# Altium PCB D-V02_touch [00ps1497][panel].PcbDoc
Units mil, origin at the board's own origin, x right, y up, seen from the top; angles counter-clockwise.
Board outline 6376.85 x 1946.26 mil, 2 copper layers (Top Layer, Bottom Layer); 20 components, 33 nets, 63 pads, 0 vias.
Unrouted connection lines stored in the file: 4.
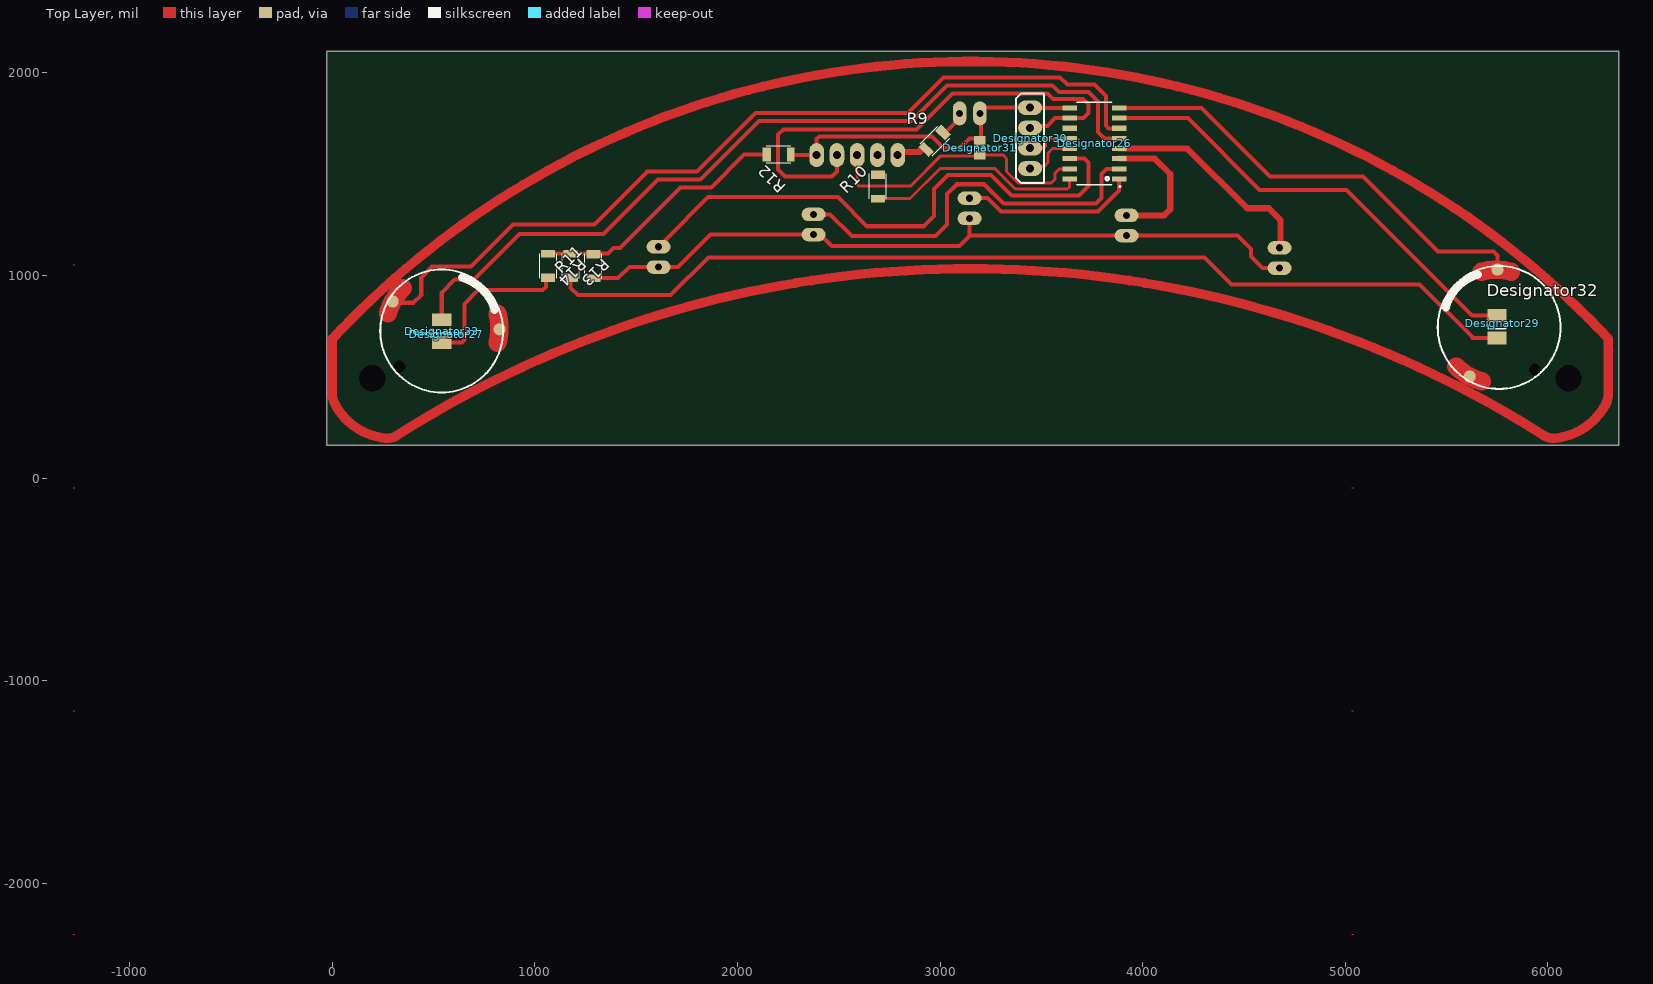
[diagram p0: Top Layer view]
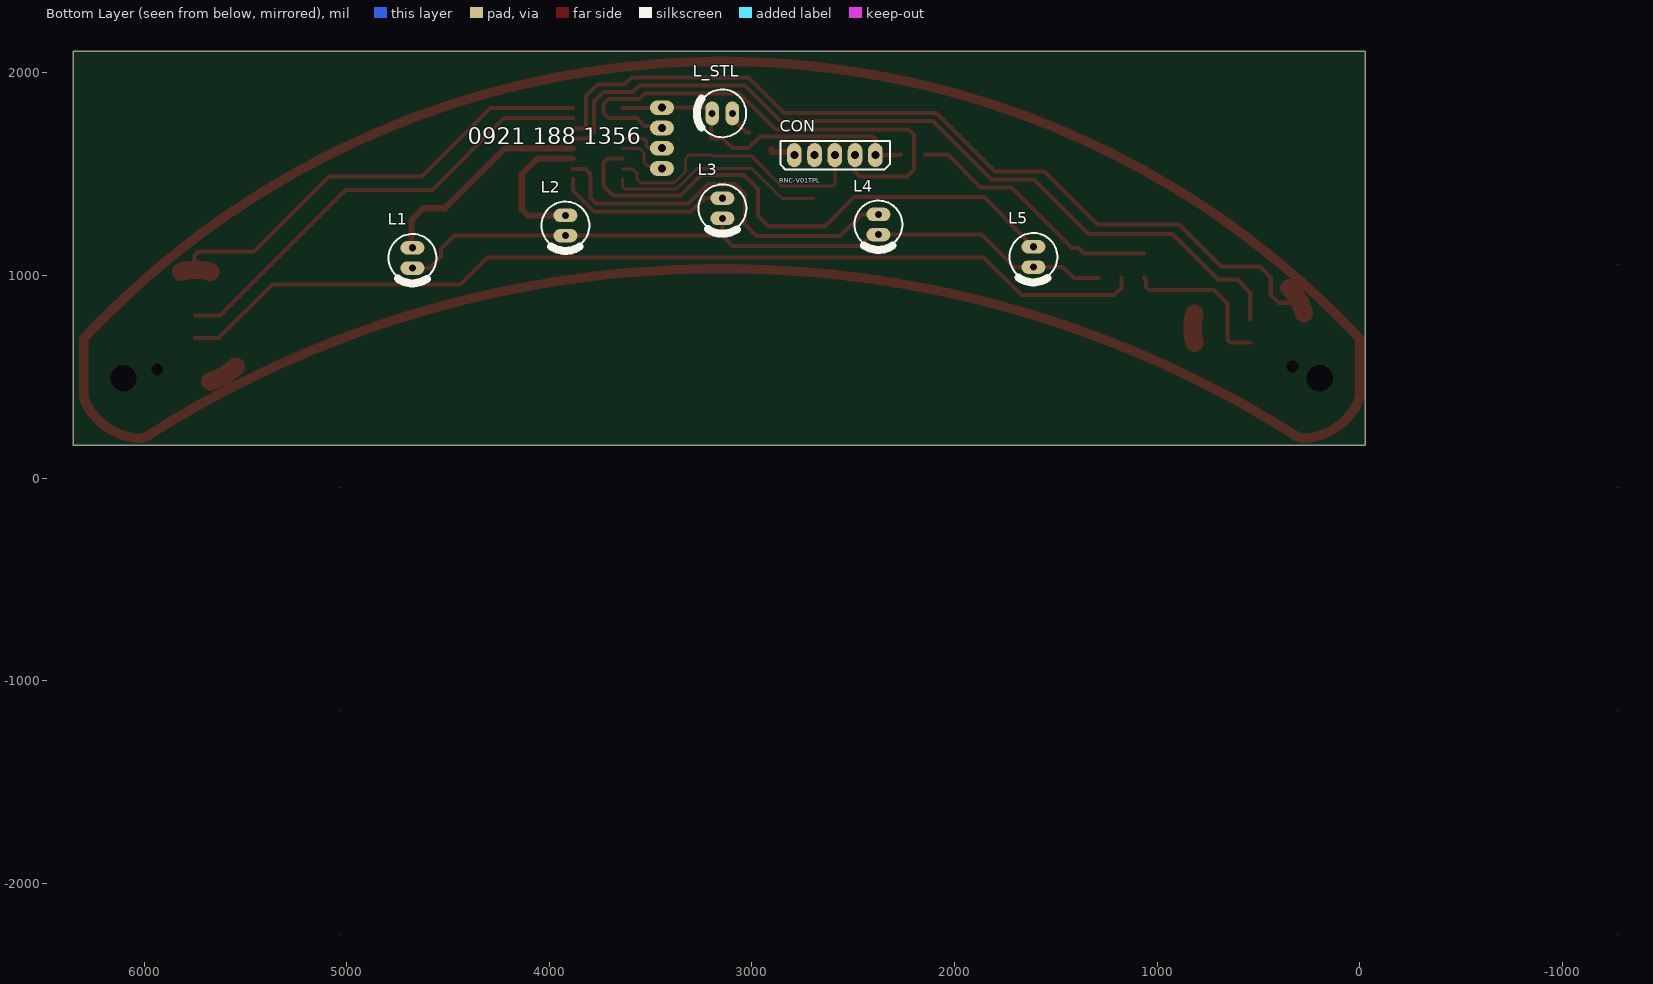
[diagram p1: Bottom Layer view, seen from below]

## Layer stack, top to bottom
Top Solder: solder mask 0.4, Solder Resist, Dk 3.5
Top Layer: signal copper 1.4
Dielectric 1: dielectric 12.6, FR-4, Dk 4.8
Bottom Layer: signal copper 1.4
Bottom Solder: solder mask 0.4, Solder Resist, Dk 3.5

## Board outline
-26.3,160.75 6350.55,160.75 6350.55,2107.01 -26.3,2107.01

## Design rules (kind name [scope] priority, off if disabled: settings)
Clearance [All] p1: gap=15 ignorepadtopadclearanceinfootprint=FALSE
PolygonConnect [All] p1: connectstyle=Relief reliefconductorwidth=10 reliefentries=4 polygonreliefangle="90 Angle" airgapwidth=10
RoutingVias [All] p1: holewidth=28 width=50 viastyle="Through Hole" minholewidth=28 minwidth=50 maxholewidth=28 maxwidth=50
SolderMaskExpansion [All] p1: expansion=4 istentingtop=FALSE
Width [All] p1: maxlimit=100 minlimit=10 preferedwidth=10 minimp=50.000000 maximp=50.000000 favimp=50.000000
30 further rules are at their usual default settings.

## Classes and differential pairs
component class jaro_khodesh_main: T1

## Components (designator, comment, footprint, x,y, rotation, side; value= is the part's Value field where it differs from the comment)
CON "" XH5 2391.08,1594.12 r0 bottom
Designator26 "Comment" bs83b08-a 3762.05,1676.61 r180 top
Designator27 "Comment" fanar-touch 529.19,733.44 r180 top
Designator29 "Comment" fanar-touch 5752.64,732.8 r270 top
Designator30 "Comment" CONECTOR/XH/4PIN 3444.37,1528.39 r90 top
Designator31 "Comment" CAP-0805 3195.92,1593.13 r90 top
Designator32 "Comment" LED2835 5746.22,752.87 r0 top
Designator33 "Comment" LED2835 536.93,731.3 r0 top
L1 "" led_dip_5MM_T 4675.87,1086.6 r0 bottom
L2 "" led_dip_5MM_T 3920.87,1246.6 r0 bottom
L3 "" led_dip_5MM_T 3145.8,1331.6 r0 bottom
L4 "" led_dip_5MM_T 2375.87,1251.6 r0 bottom
L5 "" led_dip_5MM_T 1610.87,1091.6 r0 bottom
L_STL "" led_dip_5MM_T 3146.77,1800.38 r90 bottom
R9 "10K" RES/1206 2970.67,1668.5 r225 top
R10 "10K" RES/1206 2688.27,1440.12 r270 top (schematic designator R9)
R11 "10K" RES/1206 1283.5,1047.12 r270 top (schematic designator R9)
R12 "10K" RES/1206 2202.78,1592.53 r0 top (schematic designator R9)
R13 "10K" RES/1206 1182.05,1047.4 r90 top (schematic designator R9)
R14 "10K" RES/1206 1070.31,1047.4 r90 top (schematic designator R9)

## Footprints (in the part's own frame and the unit in brackets; to place one, negate y for a bottom-side part, rotate by r counter-clockwise, add the part's x,y. Pads: shape width x height; smd on the part's side, far side on the other; paste and mask are expansions set on the pad)
bs83b08-a [mm]
  rect 1.8x0.64 smd: 1(-3.105,5.08) 2(-3.105,3.81) 3(-3.105,2.54) 4(-3.105,1.27) 5(-3.105,0) 6(-3.105,-1.27) 7(-3.105,-2.54) 8(-3.105,-3.81) 9(3.105,-3.81) 10(3.105,-2.54) 11(3.105,-1.27) 12(3.105,0) 13(3.105,1.27) 14(3.105,2.54) 15(3.105,3.81) 16(3.105,5.08)
  silkscreen extent -3.3,-4.51 2.2,6.13, body extent -3.55,-4.87 3.56,6.15, height 2.14
CAP-0805 [mm]
  rect 1.15x1.45 smd: 1(0.025,-0.022) 2(1.825,-0.022)
  silkscreen extent 0.93,-0.57 0.93,0.53, body extent -0.17,-0.71 1.84,0.54, height 0.94
CONECTOR/XH/4PIN [mm]
  oval 1.85x3 hole 1: 1(0,0) 2(2.54,0) 3(5.08,0) 4(7.62,0)
  silkscreen extent -1.81,-1.73 9.43,1.75
fanar-touch [mil]
  round 60 smd paste-60: 1(-296.59,-0.87) 1(231.39,-137.96)
  oct 0x0 hole 59.06: 5(196.51,183.17)
  Top Layer lines w90: 254.85,-78.54 cw(c-15.61,-6.07) 181.76,-204.68 ; -285.95,-78.97 cw(c-15.61,-6.07) -286.06,66.4
  silkscreen extent -314,-296 292,311, body extent -394,-371 371,397, height 634
LED2835 [mm]
  rect 2.4x1.6 smd: A(0.086,1.287) K(0.086,-1.563)
  silkscreen extent -1.01,-0.39 1.19,0.11, body extent -1.31,-1.89 1.49,1.61, height 1.85
led_dip_5MM_T [mm]
  oval 3x1.7 hole 0.9: A(0,-1.27) K(0,1.27)
  silkscreen extent -3,-3 3,3.18
RES/1206 [mm]
  rrect14% 1.09x1.77 smd: 1(-1.469,0.131)
  rrect14% 0.94x1.77 smd: 2(1.536,0.131)
  silkscreen extent -1.55,-0.93 1.55,1.2
XH5 [mm]
  oval 1.85x3 hole 1: 1(-0.003,0) 2(2.537,0) 3(5.077,0) 4(7.617,0) 5(10.157,0)
  silkscreen extent -1.81,-1.75 11.88,1.81

## Part data
CON: library part XH5
L1 L2 L3 L4 L5 L_STL: library part LED-1COLER
R9 R10 R11 R12 R13 R14: library part RES/SMD

## Free pads (board coordinates)
  round 78.74 hole 129.92: 1(197.24,492.58) 1(6102.76,492.58)

## Nets (pads, with @x,y where several pads share a name; then routed paths per layer and width w, separated by ;. In a path a pad name is that pad's centre, name@x,y a point inside that pad or via, vN(x,y) a via of type N, cw(c..) or ccw(c..) an arc to the next point about the centre after c; other vN are vias at no path point)
+5: CON.2 Designator26.10 Designator30.3 | length 2569.8
  Top Layer w20: CON.2 2490.95,1513.35 2465.47,1487.87 2235.29,1487.87 2200.87,1522.3 2200.87,1696.06 2226.38,1721.58 2884.63,1721.58 3061.28,1898.23 3530.27,1898.23 3556.7,1871.79 3706.67,1871.79 3733.11,1845.35 3733.11,1802.2 3707.52,1776.61 Designator26.10 3568.39,1776.61 3530.27,1738.5 3454.48,1738.5 Designator30.3
DRIVE: CON.4 Designator26.16 R10.1 R10.2 | length 1094
  Top Layer w15: R10.2 2852.25,1379.63 3001.01,1528.39 3270.2,1528.39 3372.03,1426.56 3629.13,1426.56 3639.8,1437.22 Designator26.16
gl1: Designator32.K R13.1 | length 4884.3
  Top Layer w20: R13.1 1176.91,938.01 1212.05,902.87 1670,902.87 1856.69,1089.57 4305.12,1089.57 4438.7,955.98 5367.6,955.98 5632.25,691.33 ; 5629.1,691.33 5632.25,691.33 ; Designator32.K 5632.25,691.33
gl2: Designator33.K R14.1 | length 782.2
  Top Layer w20: Designator33.K 639.94,669.75 651.65,681.47 651.65,859.65 719.57,927.56 1038.19,927.56 1053.86,943.23 1053.86,978.27 R14.1
GND: CON.1 Designator26.9 Designator30.4 Designator31.2 L_STL.K R11.1 R12.1 R12.2 R13.2 R14.2 | length 2936
  Top Layer w20: R14.2 R13.2 1360.8,1107.89 1388.54,1135.63 1419.84,1135.63 1719.45,1435.24 1870.71,1435.24 2033.15,1597.68 R12.1 ; R12.2 2266.83,1594.12 CON.1 2390.95,1673.39 2404.14,1686.58 2959.41,1686.58 3017.6,1628.39 3096.77,1628.39 3145,1676.61 3201.52,1676.61 3201.52,1801.96 3196.77,1806.71 3218.45,1828.39 Designator30.4 3445.26,1827.5 3638.92,1827.5 Designator26.9
L1: Designator26.4 L1.A | length 1092.8
  Top Layer w30: Designator26.4 4221.22,1626.61 4516.06,1331.77 4622.91,1331.77 4681.14,1273.54 4681.14,1131.32 L1.A
L2: Designator26.3 L2.A | length 685.9
  Top Layer w30: Designator26.3 4060.71,1576.61 4136.42,1500.91 4136.42,1326.3 4106.72,1296.6 L2.A
L3: Designator26.1 L3.A | length 864.6
  Top Layer w20: L3.A 3234.85,1381.6 3299.85,1316.6 3780.46,1316.6 3884.29,1420.43 Designator26.1
L4: Designator26.2 L4.A | length 1926.8
  Top Layer w20: L4.A 2457.89,1301.6 2565.65,1193.84 2977.57,1193.84 3034.65,1250.93 3034.65,1401.27 3083.78,1450.39 3217.56,1450.39 3312.42,1355.54 3769.9,1355.54 3797.56,1383.2 3797.56,1501.34 3822.83,1526.61 Designator26.2
L5: Designator26.14 L5.A | length 2752.3
  Top Layer w20: L5.A 1623.76,1141.6 1645.44,1163.28 1645.44,1176.17 1855.72,1386.46 2496.14,1386.46 2639.61,1242.99 2919.13,1242.99 2969.9,1293.76 2969.9,1426.56 3038.95,1495.6 3250.62,1495.6 3352.17,1394.06 3686.42,1394.06 3733.11,1440.75 3733.11,1557.28 3713.78,1576.61 Designator26.14
NetC2_2: 
NetC5_2: 
NetC6_2: 
NetD1_K: 
NetL1_A: L1.K L2.K L3.K L4.K L5.K R11.2 | length 3693.1
  Top Layer w20: R11.2 1411.08,986.63 1466.05,1041.6 L5.K 1705.69,1041.6 1866.18,1202.09 2375.38,1202.09 L4.K 2408.36,1201.6 2465.47,1144.49 3096.44,1144.49 3145.8,1193.84 ; L3.K 3145.8,1196.6 L2.K 4468.95,1196.6 4535.32,1130.24 4535.32,1094.29 4593.01,1036.6 L1.K
NetL_STL_K: L_STL.A R9.1 | length 135.8
  Top Layer w20: R9.1 3027.73,1705.74 3096.77,1774.79 L_STL.A
NetM2_1: 
NetQ1_G: 
NetR1_2: 
NetR2_1: 
p: 
p2: Designator26.13 Designator30.1 | length 234.1
  Top Layer w15: Designator30.1@3473.72,1528.39 3484.78,1539.45 3515.12,1539.45 3532.95,1557.28 3532.95,1603.97 3555.6,1626.61 Designator26.13
S_L: 
S_M: 
S_P: 
STL: CON.5 R9.2 | length 136.4
  Top Layer w30: CON.5 2790.95,1603.97 2795.92,1608.94 2899.18,1608.94 2902.68,1612.44 2902.68,1623.75
SWIM: 
t1: Designator26.8 Designator29.1@5751.77,1029.38 | length 2238
  Top Layer w20: Designator26.8 4291.14,1826.61 4629.53,1488.23 5088.46,1488.23 5457.91,1118.78 5731.1,1118.78 5751.77,1098.11 Designator29.1@5751.77,1029.38
t2: Designator26.6 Designator27.1@297.8,871.4 | length 4289.3
  Top Layer w20: Designator27.1@297.8,871.4 316.28,871.4 322.17,865.51 400.2,865.51 439.13,904.45 439.13,990.47 492.05,1043.39 683.82,1043.39 892.95,1252.52 1293.43,1252.52 1554.8,1513.9 1801.02,1513.9 2088.7,1801.58 2841.43,1801.58 3018.08,1978.23 3592.44,1978.23 3628.88,1941.79 3762.56,1941.79 3818.86,1885.49 3818.86,1740.61 3832.86,1726.61 Designator26.6
tl1: Designator26.7 Designator32.A | length 2268.4
  Top Layer w20: Designator26.7 4224.25,1776.61 4577.83,1423.03 5006.89,1423.03 5626.39,803.53 Designator32.A
tl2: Designator26.5 Designator33.A | length 4098.8
  Top Layer w20: Designator33.A 540.32,916.54 604.41,980.63 698.5,980.63 923.07,1205.2 1339.25,1205.2 1607.95,1473.9 1817.59,1473.9 2105.27,1761.58 2858,1761.58 3034.65,1938.23 3555.6,1938.23 3587.04,1906.79 3731.97,1906.79 3778.86,1859.9 3778.86,1708.5 3810.75,1676.61 Designator26.5
VCC: 
ZDC: CON.3 Designator26.12 Designator26.15 Designator30.2 Designator31.1 | length 1631.6
  Top Layer w15: CON.3 2590.95,1449.53 2599.73,1440.75 2853.86,1440.75 3003.69,1590.58 3193.23,1590.58 Designator31.1 3311.39,1594.12 3327.67,1577.84 3327.67,1513.35 3384.46,1456.56 3548.33,1456.56 3568.39,1476.61 3568.39,1505.71 3589.29,1526.61 Designator26.15 ; Designator30.2 3509.96,1628.39 3521.34,1639.76 3521.34,1665 3532.95,1676.61 Designator26.12
pads on no net: Designator26.11 Designator27.1@825.77,734.31 Designator27.5 Designator29.1@5614.68,501.41 Designator29.5
copper on no net: | length 28968.8
  Top Layer w0.5: -1278.88,-2251.07 -1271.75,-2251.07 -1278.88,-2251.07 ; -1278.88,-1149.49 -1271.75,-1149.49 -1278.88,-1149.49 ; -1278.88,-47.92 -1271.75,-47.92 -1278.88,-47.92 ; -1278.88,1053.66 -1271.75,1053.66 -1278.88,1053.66 ; 5032.14,-2251.07 5039.27,-2251.07 5032.14,-2251.07 ; 5032.14,-1149.49 5039.27,-1149.49 5032.14,-1149.49 ; 5032.14,-47.92 5039.27,-47.92 5032.14,-47.92
  Top Layer w1.18: 0,418.04 ccw(c116.28,418.04) 14.05,362.62 ccw(c295.28,515.06) 262.65,196.85 ccw(c271.58,283.92) 318.54,210.06 cw(c3149.61,-4243.25) 5980.68,210.06 ccw(c6027.63,283.92) 6036.56,196.85 ccw(c6003.94,515.06) 6285.16,362.62 ccw(c6182.93,418.04) 6299.21,418.04 6299.21,687.31 ccw(c3149.61,-2250.36) 0,687.31 0,418.04
  Top Layer w47.24: 0,418.04 ccw(c116.28,418.04) 14.05,362.62 ccw(c295.28,515.06) 262.65,196.85 ccw(c271.58,283.92) 318.54,210.06 cw(c3149.61,-4243.25) 5980.68,210.06 ccw(c6027.63,283.92) 6036.56,196.85 ccw(c6003.94,515.06) 6285.16,362.62 ccw(c6182.93,418.04) 6299.21,418.04 6299.21,687.31 ccw(c3149.61,-2250.36) 0,687.31 0,418.04

## Silkscreen, mask and mechanical layers (free items; w line width, h text height)
Bottom Overlay:
  text "0921 188 1356" at 4403.31,1619.75 h137.8
  text "RNC-V01TPL" at 2865.51,1449.08 h39.37
Mechanical 1:
  circle w1.18: c6102.76,453.22 r64.96
  circle w1.18: c2791.58,1861.15 r36.64
  circle w1.18: c2691.58,1861.15 r36.64
  circle w1.18: c2591.58,1861.15 r36.64
  circle w1.18: c2491.58,1861.15 r36.64
  circle w1.18: c2391.58,1861.15 r36.64
  circle w1.18: c6102.76,453.22 r64.96
  circle w1.18: c197.24,453.22 r64.96
  lines w0.5: -1278.88,-2251.07 -1271.75,-2251.07 ; -1278.88,-2251.07 -1271.75,-2251.07 ; -1278.88,-2251.07 -1271.75,-2251.07 ; -1278.88,-1149.49 -1271.75,-1149.49 ; -1278.88,-1149.49 -1271.75,-1149.49 ; -1278.88,-1149.49 -1271.75,-1149.49 ; -1278.88,-47.92 -1271.75,-47.92 ; -1278.88,-47.92 -1271.75,-47.92 ; -1278.88,-47.92 -1271.75,-47.92 ; -1278.88,1053.66 -1271.75,1053.66 ; -1278.88,1053.66 -1271.75,1053.66 ; -1278.88,1053.66 -1271.75,1053.66 ; 5032.14,-2251.07 5039.27,-2251.07 ; 5032.14,-2251.07 5039.27,-2251.07 ; 5032.14,-2251.07 5039.27,-2251.07 ; 5032.14,-1149.49 5039.27,-1149.49 ; 5032.14,-1149.49 5039.27,-1149.49 ; 5032.14,-1149.49 5039.27,-1149.49 ; 5032.14,-47.92 5039.27,-47.92 ; 5032.14,-47.92 5039.27,-47.92 ; 5032.14,-47.92 5039.27,-47.92
  lines w10: -26.3,160.75 6350.55,160.75 6350.55,2107.01 -26.3,2107.01 -26.3,160.75